# EAGLE board cube bottom 3 (EAGLE 9.5.1)
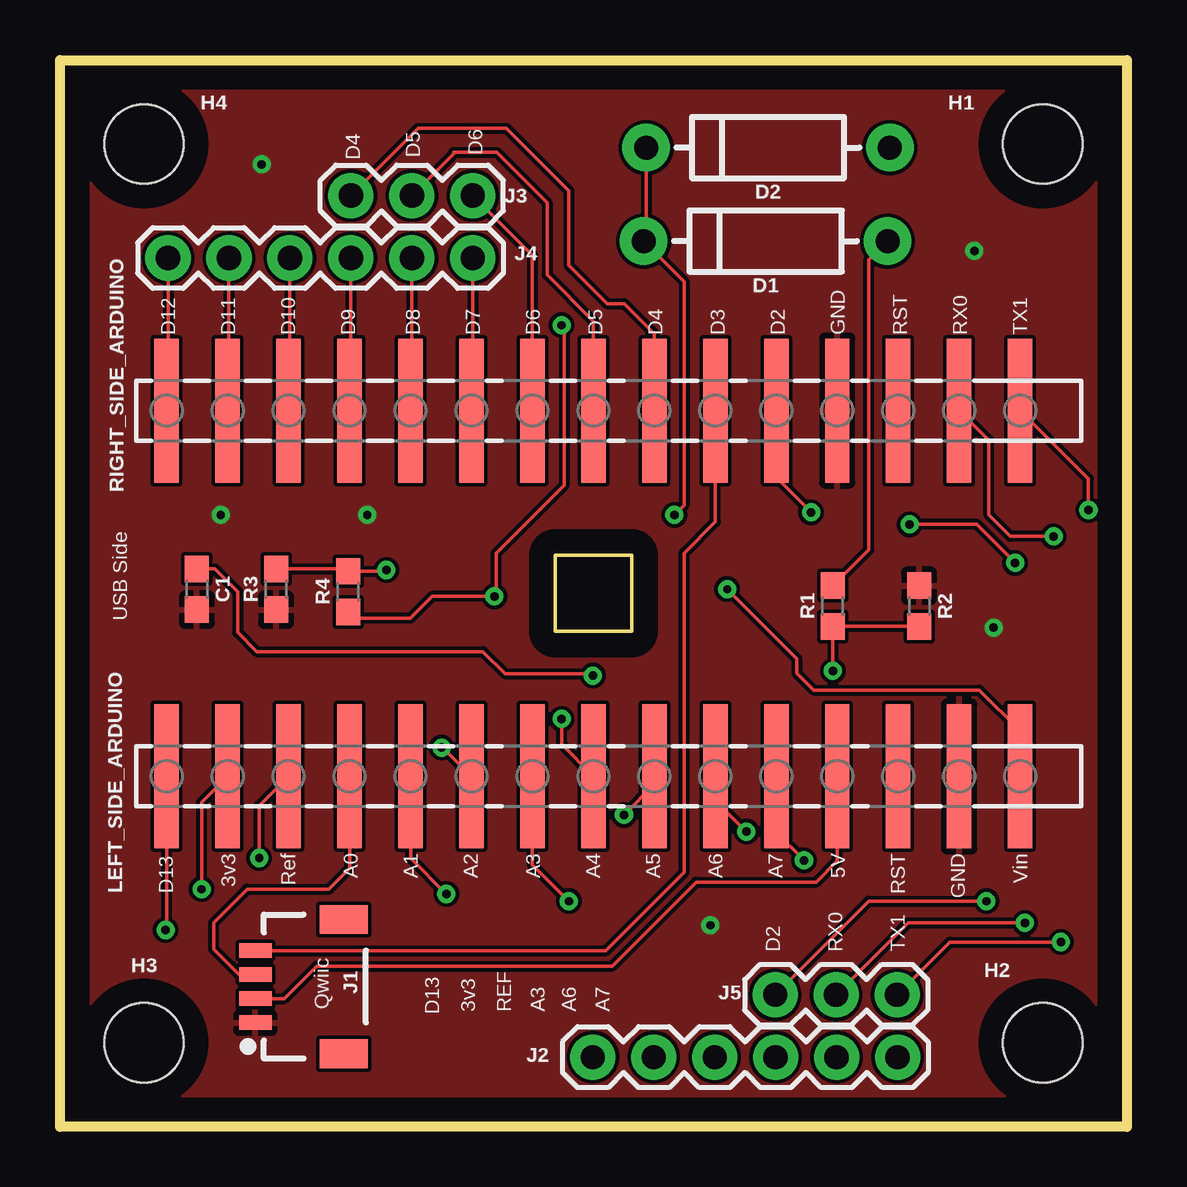
[diagram p0: board, top side]
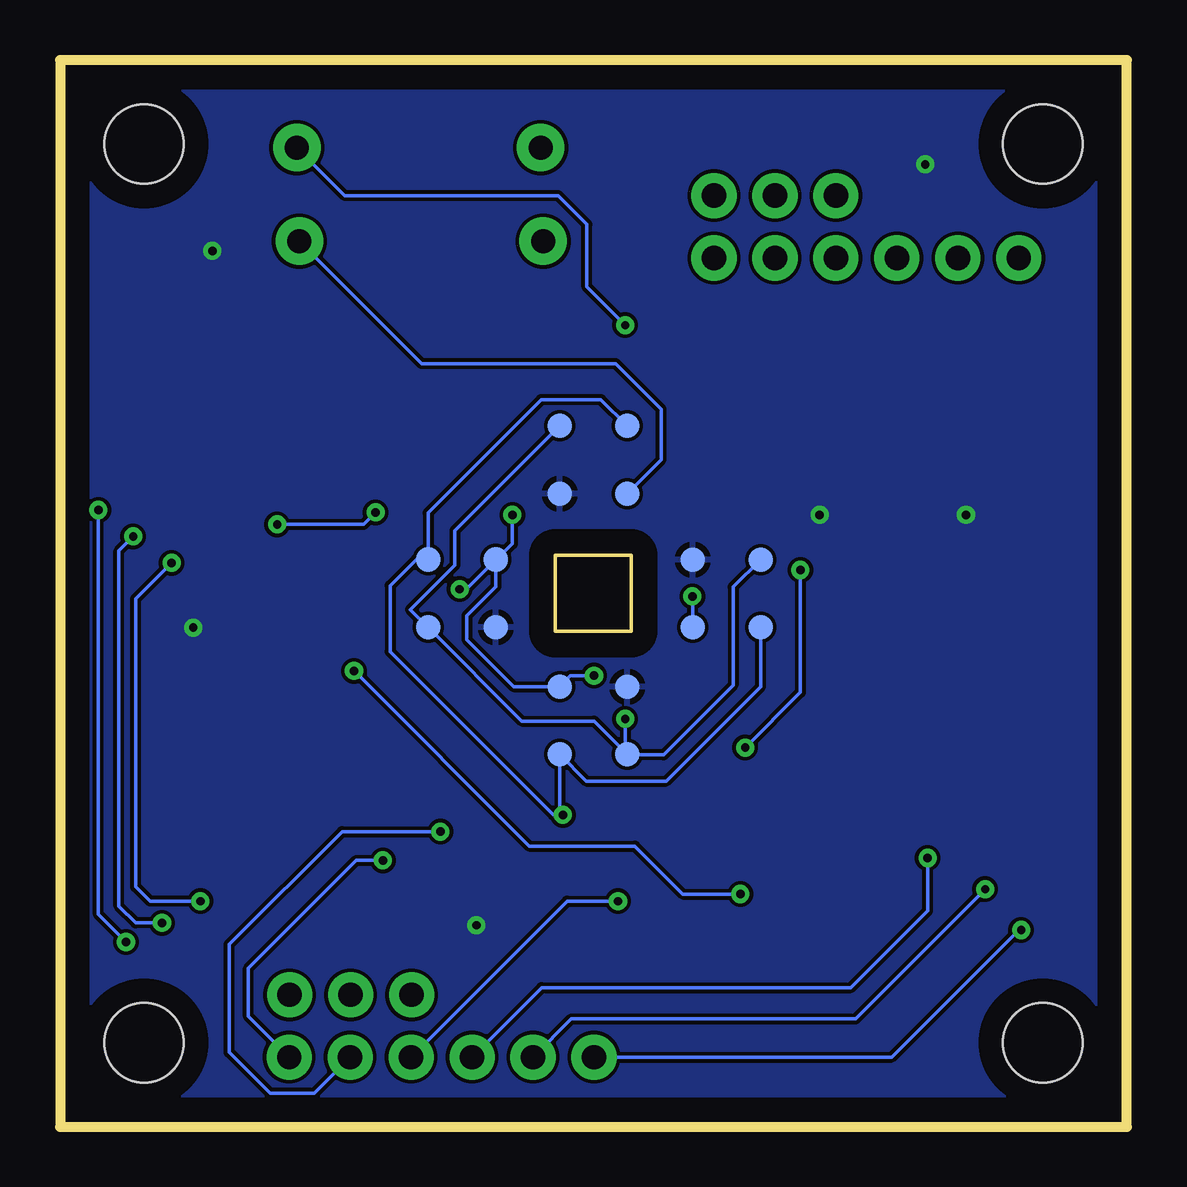
[diagram p1: board, bottom side, seen from below]

Size 44.45 x 44.45 mm. Coordinates in mm from the lower left corner, seen from the top.
Outline: 0,0 0,44.45 44.45,44.45 44.45,0 0,0
Copper layers (1*16): Top 0.035mm / dielectric 1.5mm / Bottom 0.035mm
Design rules "default": minimum track width 6mil, minimum drill 0.35mm, track to track 6mil, track to pad 6mil, pad to pad 6mil, via to via 6mil, smd to smd 6mil, copper to edge 40mil, drill to drill 6mil, minimum pad ring 10mil, minimum via ring 8mil, stop-mask expansion 4mil, vias tented up to drill 0mil, thermal gap 10mil

## Footprints (pad centres in the part's own frame; a part is rotated, then mirrored left to right if it is on the bottom)
0603 = smd 1.1 x 1: 1 -0.85,0; 2 0.85,0
DIODE-1N4001 = drill 1 pad 1.981: A -5.08,0; C 5.08,0
PAD.03X.04 = smd 1.016 x 1.016: P$1 0,0
STAND-OFF = hole 3.302: 0,0
1X04_1MM_RA = smd 0.6 x 1.35: 1 -1.5,0; 2 -0.5,0; 3 0.5,0; 4 1.5,0 | smd 1.2 x 2: NC1 2.8,-3.675; NC2 -2.8,-3.675
1X06 = drill 1.016 pad 1.88: 1 0,0; 2 2.54,0; 3 5.08,0; 4 7.62,0; 5 10.16,0; 6 12.7,0
1X03 = drill 1.016 pad 1.88: 1 0,0; 2 2.54,0; 3 5.08,0
1X15_SMD_MALE = smd 1.02 x 6: 1 0,0; 2 2.54,0; 3 5.08,0; 4 7.62,0; 5 10.16,0; 6 12.7,0; 7 15.24,0; 8 17.78,0; 9 20.32,0; 10 22.86,0; 11 25.4,0; 12 27.94,0; 13 30.48,0; 14 33.02,0; 15 35.56,0

## Placement (x,y rotation side)
C1  0.1uF  [0603]  5.7,22.4 270 top
D1  1A/50V/1.1V  [DIODE-1N4001]  29.4,36.9 180 top
D2  1A/50V/1.1V  [DIODE-1N4001]  29.5,40.8 180 top
DTP1  TEST-POINT3X4  [PAD.03X.04]  18.08,20.81 0 bottom
DTP2  TEST-POINT3X4  [PAD.03X.04]  20.81,26.38 0 bottom
FRAME1  FRAME-LETTERNO_PACKAGE  [DUMMY]  0,0 0 top
H1  STAND-OFF  [STAND-OFF]  40.95,40.95 0 top
H2  STAND-OFF  [STAND-OFF]  40.95,3.5 0 top
H3  STAND-OFF  [STAND-OFF]  3.5,3.5 0 top
H4  STAND-OFF  [STAND-OFF]  3.5,40.95 0 top
ITP  TEST-POINT3X4  [PAD.03X.04]  26.29,23.64 0 bottom
ITP2  TEST-POINT3X4  [PAD.03X.04]  23.64,18.34 0 bottom
J1  [1X04_1MM_RA]  8.14,5.84 90 top
J2  [1X06]  22.2,2.9 0 top
J3  [1X03]  17.2,38.8 180 top
J4  [1X06]  4.5,36.2 0 top
J5  [1X03]  29.8,5.5 0 top
LEFT_SIDE_ARDUINO  [1X15_SMD_MALE]  4.45,14.61 0 top
R1  10k  [0603]  32.2,21.7 90 top
R2  10k  [0603]  35.8,21.7 270 top
R3  10k  [0603]  9,22.4 90 top
R4  10k  [0603]  12,22.3 90 top
RIGHT_SIDE_ARDUINO  [1X15_SMD_MALE]  4.45,29.84 0 top
TP5  TEST-POINT3X4  [PAD.03X.04]  23.64,29.2 0 bottom
TP6  TEST-POINT3X4  [PAD.03X.04]  15.26,23.64 0 bottom
TP7  TEST-POINT3X4  [PAD.03X.04]  20.81,15.52 0 bottom
TP8  TEST-POINT3X4  [PAD.03X.04]  29.12,20.81 0 bottom
TP9  TEST-POINT3X4  [PAD.03X.04]  29.12,23.64 0 bottom
TP10  TEST-POINT3X4  [PAD.03X.04]  20.81,29.2 0 bottom
TP11  TEST-POINT3X4  [PAD.03X.04]  15.26,20.81 0 bottom
TP12  TEST-POINT3X4  [PAD.03X.04]  23.64,15.52 0 bottom
TP13  TEST-POINT3X4  [PAD.03X.04]  18.08,23.64 0 bottom
TP14  TEST-POINT3X4  [PAD.03X.04]  20.81,18.34 0 bottom
TP15  TEST-POINT3X4  [PAD.03X.04]  26.29,20.81 0 bottom
TP16  TEST-POINT3X4  [PAD.03X.04]  23.64,26.38 0 bottom

## Library data of the parts
C1 = SparkFun-Capacitors; PROD_ID: CAP-08604
D1 D2 = SparkFun-DiscreteSemi; PROD_ID: DIO-09176
DTP1 DTP2 ITP ITP2 J1 J3 J5 TP5-TP16 = SparkFun-Connectors
FRAME1 = SparkFun-Aesthetics; DESIGNER: Nobody; VERSION: v01
H1-H4 = SparkFun-Hardware
J2 J4 = SparkFun-Connectors; PROD_ID: CONN-08437
LEFT_SIDE_ARDUINO RIGHT_SIDE_ARDUINO = capstone footprints; PROD_ID: CONN-11293
R1-R4 = SparkFun-Resistors; PROD_ID: RES-00824

## Nets
3V3: J2.2 LEFT_SIDE_ARDUINO.2
5V: J1.2 LEFT_SIDE_ARDUINO.12
A0: J1.3 LEFT_SIDE_ARDUINO.4
A1: LEFT_SIDE_ARDUINO.5 R1.1 R2.2
A2: LEFT_SIDE_ARDUINO.6 R3.2 R4.2
A3: J2.4 LEFT_SIDE_ARDUINO.7
A4_SDA: LEFT_SIDE_ARDUINO.8 TP5.P$1 TP6.P$1 TP7.P$1 TP8.P$1
A5_SCL: LEFT_SIDE_ARDUINO.9 TP9.P$1 TP10.P$1 TP11.P$1 TP12.P$1
A6: J2.5 LEFT_SIDE_ARDUINO.10
A7: J2.6 LEFT_SIDE_ARDUINO.11
D2: J5.1 RIGHT_SIDE_ARDUINO.11
D3: J1.4 RIGHT_SIDE_ARDUINO.10
D4: J3.3 RIGHT_SIDE_ARDUINO.9
D5: J3.2 RIGHT_SIDE_ARDUINO.8
D6: J3.1 RIGHT_SIDE_ARDUINO.7
D7: J4.6 RIGHT_SIDE_ARDUINO.6
D8: J4.5 RIGHT_SIDE_ARDUINO.5
D9: J4.4 RIGHT_SIDE_ARDUINO.4
D10: J4.3 RIGHT_SIDE_ARDUINO.3
D11: J4.2 RIGHT_SIDE_ARDUINO.2
D12: J4.1 RIGHT_SIDE_ARDUINO.1
D13: J2.1 LEFT_SIDE_ARDUINO.1
DTP1: D2.A DTP1.P$1 R4.1
DTP2: D1.A DTP2.P$1 R1.2
GND: C1.2 J1.1 LEFT_SIDE_ARDUINO.14 R2.1 R3.1 RIGHT_SIDE_ARDUINO.12 TP13.P$1 TP14.P$1 TP15.P$1 TP16.P$1
REF: J2.3 LEFT_SIDE_ARDUINO.3
RST: LEFT_SIDE_ARDUINO.13
RST2: RIGHT_SIDE_ARDUINO.13
RX0: J5.2 RIGHT_SIDE_ARDUINO.14
TX1: J5.3 RIGHT_SIDE_ARDUINO.15
VIN: C1.1 D1.C D2.C ITP2.P$1 ITP.P$1 LEFT_SIDE_ARDUINO.15

## Tracks (layer width: path | path; a pad name or v marks a point on that pad's centre or on a via)
3V3  (via drill 0.35)
  Top 0.152: v5.9,9.9 5.9,13.52 LEFT_SIDE_ARDUINO.2
  Bottom 0.152: J2.2 23.14,4.5 11.3,4.5 v5.9,9.9
5V
  Top 0.152: J1.2 9.34,5.34 10.7,6.7 23,6.7 26.5,10.2 31.5,10.2 32.38,11.09 LEFT_SIDE_ARDUINO.12
A0
  Top 0.152: J1.3 7.46,6.34 6.4,7.4 6.4,8.5 7.8,9.9 11.2,9.9 12.06,10.77 LEFT_SIDE_ARDUINO.4
A1  (via drill 0.35)
  Top 0.152: R2.2 R1.1 v32.2,19 | v16.1,9.7 14.61,11.2 LEFT_SIDE_ARDUINO.5
  Bottom 0.152: v32.2,19 24.9,11.7 20.5,11.7 18.5,9.7 v16.1,9.7
A2  (via drill 0.35)
  Top 0.152: R3.2 11.9,23.25 R4.2 13.55,23.15 v13.6,23.2 | v15.9,15.8 15.95,15.8 LEFT_SIDE_ARDUINO.6
  Bottom 0.152: v13.6,23.2 13.6,18.1 v15.9,15.8
A3  (via drill 0.35)
  Top 0.152: v21.2,9.4 19.68,10.91 LEFT_SIDE_ARDUINO.7
  Bottom 0.152: J2.4 23.32,9.4 v21.2,9.4
A4_SDA  (via drill 0.35)
  Top 0.152: LEFT_SIDE_ARDUINO.8 20.9,15.93 v20.9,17
  Bottom 0.152: TP7.P$1 22.19,16.9 25.2,16.9 TP8.P$1 29.85,21.55 28,23.4 28,24.84 TP5.P$1 | TP6.P$1 16.4,22.49 16.4,18.4 19.3,15.5 20.79,15.5 TP7.P$1 | v20.9,17 20.9,15.61 TP7.P$1
A5_SCL  (via drill 0.35)
  Top 0.152: v23.5,13 24.77,14.27 LEFT_SIDE_ARDUINO.9
  Bottom 0.152: TP10.P$1 21.91,30.3 24.4,30.3 29.12,25.58 TP9.P$1 29.62,23.64 30.7,22.55 30.7,19.8 23.9,13 23.6,13 | 23.6,13 v23.5,13 | 23.6,13 23.64,13.04 TP12.P$1 22.51,14.4 19.2,14.4 15.26,18.34 TP11.P$1
A6  (via drill 0.35)
  Top 0.152: v28.6,12.3 27.3,13.6 LEFT_SIDE_ARDUINO.10
  Bottom 0.152: J2.5 33.86,1.4 35.7,1.4 37.4,3.1 37.4,7.6 32.7,12.3 v28.6,12.3
A7  (via drill 0.35)
  Top 0.152: v31,11.1 29.84,12.26 LEFT_SIDE_ARDUINO.11
  Bottom 0.152: J2.6 36.6,4.6 36.6,6.6 32.1,11.1 v31,11.1
D2  (via drill 0.35)
  Top 0.152: J5.1 33.7,9.4 v38.6,9.4 | v39.8,23.5 38.2,25.1 v35.4,25.1 | v31.3,25.6 29.84,27.05 RIGHT_SIDE_ARDUINO.11
  Bottom 0.152: v39.8,23.5 41.3,22 41.3,10 40.7,9.4 v38.6,9.4 | v35.4,25.1 31.8,25.1 v31.3,25.6
D3
  Top 0.152: J1.4 22.74,7.34 26,10.6 26,23.9 27.3,25.2 RIGHT_SIDE_ARDUINO.10
D4
  Top 0.152: J3.3 14.92,41.6 18.6,41.6 21.2,39 21.2,35.9 22.8,34.3 23.5,34.3 24.77,33.03 RIGHT_SIDE_ARDUINO.9
D5
  Top 0.152: J3.2 16.4,40.54 16.4,40.6 18.2,40.6 20.3,38.5 20.3,35.5 22.23,33.58 RIGHT_SIDE_ARDUINO.8
D6
  Top 0.152: J3.1 19.68,36.31 RIGHT_SIDE_ARDUINO.7
D7
  Top 0.152: J4.6 17.2,29.9 RIGHT_SIDE_ARDUINO.6
D8
  Top 0.152: J4.5 14.66,29.9 RIGHT_SIDE_ARDUINO.5
D9
  Top 0.152: J4.4 12.12,29.9 RIGHT_SIDE_ARDUINO.4
D10
  Top 0.152: J4.3 9.58,29.9 RIGHT_SIDE_ARDUINO.3
D11
  Top 0.152: J4.2 7.04,29.9 RIGHT_SIDE_ARDUINO.2
D12
  Top 0.152: J4.1 4.5,29.84 RIGHT_SIDE_ARDUINO.1
D13  (via drill 0.35)
  Top 0.152: v4.4,8.2 4.45,8.24 LEFT_SIDE_ARDUINO.1
  Bottom 0.152: J2.1 9.8,2.9 4.5,8.2 v4.4,8.2
DTP1  (via drill 0.35)
  Top 0.152: R4.1 12.25,21.2 14.6,21.2 15.5,22.1 v18.1,22.1 18.17,22.17 18.17,23.9 21,26.73 21,33.3 v20.9,33.4
  Bottom 0.152: DTP1.P$1 18.08,22.08 v18.1,22.1 | v20.9,33.4 22.5,35 22.5,37.6 23.7,38.8 32.58,38.8 D2.A
DTP2
  Top 0.152: R1.2 33.7,24.05 33.7,36.12 D1.A
  Bottom 0.152: DTP2.P$1 19.4,27.8 19.4,29.9 21.3,31.8 29.38,31.8 D1.A
GND  (via drill 0.35)
  other vias: 8.4,40.1 6.7,25.5 12.8,25.5 38.1,36.5 27.1,8.4 38.9,20.8
  pour Top: -0.1,44.5 44.5,44.5 44.5,-0.1 -0.1,-0.1
  pour Bottom: -0.1,44.5 44.5,44.5 44.5,-0.1 -0.1,-0.1
REF  (via drill 0.35)
  Top 0.152: v8.3,11.2 8.3,13.38 LEFT_SIDE_ARDUINO.3
  Bottom 0.152: J2.3 24.38,5.8 11.5,5.8 8.3,9 v8.3,11.2
RX0  (via drill 0.35)
  Top 0.152: J5.2 35.34,8.5 v40.2,8.5 | v41.4,24.6 39.6,24.6 38.7,25.5 38.7,28.61 RIGHT_SIDE_ARDUINO.14
  Bottom 0.152: v40.2,8.5 41.3,8.5 42,9.2 42,24 v41.4,24.6
TX1  (via drill 0.35)
  Top 0.152: J5.3 37.08,7.7 v41.7,7.7 | v42.85,25.7 42.85,27 RIGHT_SIDE_ARDUINO.15
  Bottom 0.152: v41.7,7.7 42.85,8.85 v42.85,25.7
VIN  (via drill 0.35)
  Top 0.152: D2.C 24.42,37 D1.C 26,35.22 26,25.9 v25.6,25.5 | C1.1 6.45,23.25 7.4,22.3 7.4,20.6 8.2,19.8 17.62,19.8 18.55,18.87 22.13,18.87 v22.2,18.8 | v27.8,22.4 30.7,19.5 30.7,18.9 31.4,18.2 38.3,18.2 40.01,16.5 LEFT_SIDE_ARDUINO.15
  Bottom 0.152: ITP.P$1 26.29,22.51 27.5,21.3 27.5,20.3 25.54,18.34 ITP2.P$1 23.18,18.8 v22.2,18.8 | v25.6,25.5 25.6,24.29 26.26,23.64 ITP.P$1 | ITP.P$1 27.53,22.4 v27.8,22.4

## Text on the board
tPlace: D4 | D5 | D6 | D12 | D11 | D10 | D9 | D8 | D7 | D6 | D5 | D4 | D3 | D2 | GND | RST | RX0 | TX1 | USB Side | D13 | 3v3 | Ref | A0 | A1 | A2 | A3 | A4 | A5 | A6 | A7 | 5V | RST | GND | Vin | D2 | RX0 | TX1 | Qwiic | D13 | 3v3 | REF | A3 | A6 | A7